# Altium PCB Shield.PcbDoc (part 3 of 3)
Units mm, origin at the board's own origin, x right, y up, seen from the top; angles counter-clockwise.
Board outline 69.82 x 93.25 mm, 4 copper layers (Top Layer, Int1 (GND), Int2 (PWR), Bottom Layer), stack 1.586 mm thick; 51 components, 80 nets, 458 pads, 669 vias.
Unrouted connection lines stored in the file: 105.
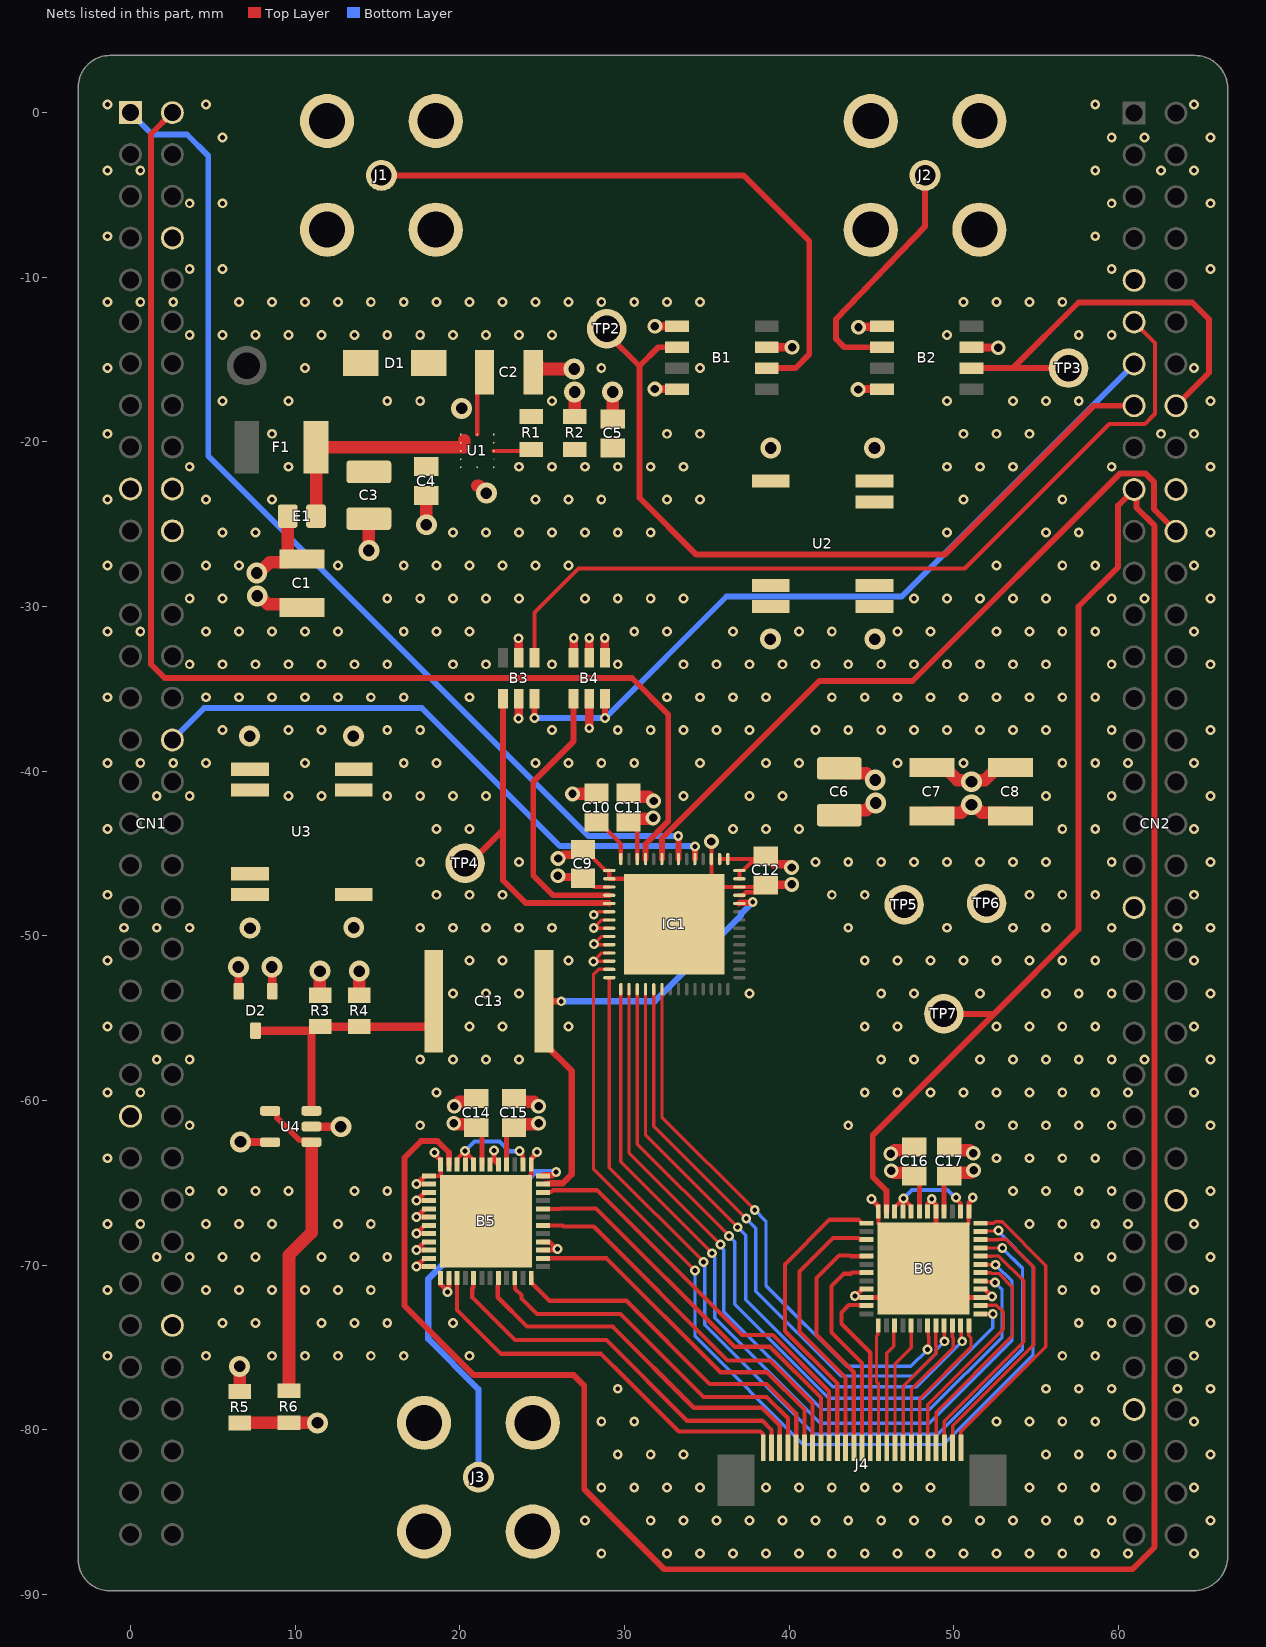
[diagram p4: the nets of this part, all layers, seen from the top]

## Via types
v1: diameter 0.6, hole 0.3, Top Layer to Bottom Layer, 618 vias
v2: diameter 1.27, hole 0.711, Top Layer to Bottom Layer, 29 vias
v3: diameter 0.9, hole 0.508, Top Layer to Bottom Layer, 22 vias

## Nets (pads, with @x,y where several pads share a name; then routed paths per layer and width w, separated by ;. In a path a pad name is that pad's centre, name@x,y a point inside that pad or via, vN(x,y) a via of type N, cw(c..) or ccw(c..) an arc to the next point about the centre after c; other vN are vias at no path point) (continued)
CH17: B6.19 IC1.48 | length 34.4
  Top Layer w0.203: IC1.48@32.282,-53.237 32.282,-61.011 v1(37.917,-66.646) ; v1(48.412,-75.133) 48.478,-75.067 48.478,-74.33 48.464,-74.316 48.464,-73.704 B6.19@48.416,-73.656
  Bottom Layer w0.203: v1(37.917,-66.646) 38.598,-67.327 38.598,-71.237 43.51,-76.149 47.396,-76.149 v1(48.412,-75.133)
CH18: B6.21 IC1.47 | length 36.5
  Top Layer w0.203: IC1.47@31.782,-53.237 31.782,-61.555 v1(37.399,-67.173) ; B6.21@49.416,-73.656 49.43,-73.67 49.43,-74.611 v1(49.444,-74.625)
  Bottom Layer w0.203: v1(37.399,-67.173) 37.973,-67.747 37.973,-71.577 43.129,-76.733 47.56,-76.733 48.941,-75.352 48.941,-75.128 v1(49.444,-74.625)
CH19: B6.23 IC1.46 | length 38.9
  Top Layer w0.203: IC1.46@31.282,-53.237 31.282,-62.1 v1(36.881,-67.699) ; B6.23@50.416,-73.656 50.464,-73.704 50.464,-74.569 v1(50.521,-74.625)
  Bottom Layer w0.203: v1(36.881,-67.699) 37.363,-68.182 37.363,-72.111 42.647,-77.394 47.752,-77.394 v1(50.521,-74.625)
CH20: B6.25 IC1.45 | length 43
  Top Layer w0.203: IC1.45@30.782,-53.237 30.782,-62.645 v1(36.363,-68.226) ; B6.25@51.616,-72.956 v1(52.375,-72.957)
  Bottom Layer w0.203: v1(36.363,-68.226) 36.703,-68.566 36.703,-72.365 42.418,-78.08 48.108,-78.08 52.375,-73.812 v1(52.375,-72.957)
CH21: B6.29 IC1.44 | length 47.6
  Top Layer w0.203: IC1.44@30.282,-53.237 30.282,-63.19 v1(35.844,-68.753) ; B6.29@51.616,-70.956 51.662,-71.002 52.455,-71.002 v1(52.502,-71.049)
  Bottom Layer w0.203: v1(35.844,-68.753) 35.844,-68.86 36.043,-69.058 36.043,-72.822 41.986,-78.765 48.539,-78.765 52.934,-74.371 52.934,-71.481 v1(52.502,-71.049)
CH22: B6.31 IC1.43 | length 51.1
  Top Layer w0.203: IC1.43@29.782,-53.237 29.782,-63.735 v1(35.326,-69.279) ; B6.31@51.616,-69.956 51.626,-69.966 52.517,-69.966 v1(52.527,-69.977)
  Bottom Layer w0.203: v1(35.326,-69.279) 35.326,-69.387 35.484,-69.544 35.484,-73.203 41.885,-79.604 48.514,-79.604 53.543,-74.574 53.543,-70.993 v1(52.527,-69.977)
CH23: B6.33 IC1.42 | length 55.6
  Top Layer w0.203: IC1.42@29.082,-52.537 29.082,-64.079 v1(34.808,-69.806) ; B6.33@51.616,-68.956 51.618,-68.958 52.948,-68.958 v1(52.951,-68.961)
  Bottom Layer w0.203: v1@34.884,-69.854 34.884,-73.619 41.529,-80.264 49.022,-80.264 54.178,-75.108 54.178,-70.188 v1(52.951,-68.961)
CH24: B6.35 IC1.41 | length 60.7
  Top Layer w0.203: IC1.41@29.082,-52.037 28.43,-52.037 28.118,-52.349 28.118,-64.16 v1(34.29,-70.333) ; B6.35@51.616,-67.956 51.641,-67.93 52.704,-67.93 v1(52.73,-67.904)
  Bottom Layer w0.203: v1(34.29,-70.333) 34.29,-74.32 40.869,-80.899 49.378,-80.899 54.813,-75.463 54.813,-70.053 52.73,-67.97 v1(52.73,-67.904)
DAC_OUT: B3.1 CN2.11 | length 51.5
  Top Layer w0.254: B3.1@24.533,-33.103 24.533,-30.356 27.203,-27.686 50.673,-27.686 59.448,-18.911 61.607,-18.911 62.23,-18.288 62.23,-13.995 CN2.11@60.96,-12.725
ELEC_TEST: B3.4 IC1.33 TP4.1 | length 20.9
  Top Layer w0.357: TP4.1@20.599,-45.593 22.633,-43.559 ; B3.4@22.633,-35.603 22.633,-43.559 ; IC1.33@29.082,-48.037 29.055,-48.01 24.007,-48.01 22.633,-46.636 22.633,-43.559
GND: B1.5 B2.3 B3.2 B4.2 B4.3 B5.1 B5.2 B5.3 B5.4 B5.5 B5.6 B5.7 B5.8 B5.9 B5.10 B5.11 B5.12 B5.13 B5.14 B5.27 B5.28 B5.37 B5.41 B5.42 B5.48 B5.49 B6.9 B6.10 B6.27 B6.28 B6.37 B6.41 B6.42 B6.48 B6.49 C1.2 C2.2 C3.2 C4.2 C6.2 C7.2 C8.2 C9.1 C10.1 C11.1 C12.1 C14.1 C15.1 C16.1 C17.1 CN1.08 CN1.19 CN1.20 CN1.22 CN1.49 CN1.60 CN2.09 CN2.20 CN2.39 CN2.54 CN2.63 D1.2 IC1.11 IC1.12 IC1.17 IC1.29 IC1.30 IC1.34 IC1.35 IC1.36 IC1.37 IC1.38 IC1.39 IC1.40 IC1.57 R2.2 R5.2 TP5.1 U1.5 U1.6 U1.7 U1.12 U2.1 U2.2 U3.1 U3.2 | length 97
  Top Layer w0.203: v1(28.118,-51.552) v1@28.133,-51.537 ; v1(28.136,-49.518) v1@28.155,-49.5 ; v1(28.136,-48.717) 28.244,-48.717 28.424,-48.537 IC1.34@29.082,-48.537 ; 28.449,-49.537 IC1.36@29.082,-49.537 ; 28.449,-49.5 v1@28.155,-49.5 ; IC1.40@29.082,-51.537 29.08,-51.539 28.135,-51.539 v1@28.133,-51.537 ; IC1.39@29.082,-51.037 29.08,-51.039 28.632,-51.039 v1@28.133,-51.537 ; IC1.38@29.082,-50.537 28.192,-50.537 v1(28.155,-50.5) 28.616,-50.039 IC1.37@29.082,-50.037 IC1.37@29.082,-50.037 ; IC1.35@29.082,-49.037 28.618,-49.037 v1@28.155,-49.5
  Top Layer w0.254: B5.11@17.865,-69.585 B5.11@18.14,-69.585 ; B5.9@17.865,-68.585 B5.9@18.14,-68.585 ; B5.7@17.865,-67.585 B5.7@18.14,-67.585 ; B5.5@17.865,-66.585 B5.5@18.14,-66.585 ; B5.3@17.865,-65.585 B5.3@18.14,-65.585 ; B5.1@18.14,-64.585 18.84,-64.585 B5.48@18.84,-63.885 ; U1.12@21.057,-19.549 C2.2@21.057,-16.203 ; B5.49@24.34,-64.585 B5.37@24.34,-63.885 ; C9.1@27.255,-44.98 C9.1@27.481,-44.754 27.636,-44.754 28.089,-45.207 28.089,-45.265 28.861,-46.037 IC1.29@29.082,-46.037 IC1.30@29.082,-46.537 IC1.57@30.282,-46.537 ; IC1.17@35.282,-45.337 v3(35.281,-44.272) ; IC1.17@35.282,-45.337 35.282,-47.037 IC1.12@36.982,-47.037 C12.1@38.326,-47.037 ; IC1.11@36.982,-47.537 37.203,-47.537 37.387,-47.353 38.13,-47.353 C12.1@38.583,-46.9 ; B6.48@45.416,-66.756 45.428,-66.768 45.428,-67.468 B6.49@48.166,-70.206 48.916,-69.456 50.893,-67.479 50.893,-66.779 B6.37@50.916,-66.756 ; B6.42@48.416,-66.756 B6.42@48.416,-66.481
  Top Layer w0.305: B5.11@17.865,-69.585 v1(17.374,-70.077) 17.38,-70.083 B5.12@17.867,-70.083 ; B5.9@17.865,-68.585 v1(17.374,-69.077) 17.38,-69.083 B5.10@17.867,-69.083 ; B5.7@17.865,-67.585 v1(17.374,-68.077) 17.38,-68.083 B5.8@17.867,-68.083 ; B5.5@17.865,-66.585 17.865,-66.594 v1(17.374,-67.085) B5.6@18.115,-67.085 ; B5.3@17.865,-65.585 17.865,-65.594 v1(17.374,-66.085) B5.4@18.115,-66.085 ; B5.1@17.865,-64.585 v1(17.374,-65.077) 17.38,-65.083 B5.2@17.867,-65.083 ; v1(18.455,-63.165) 18.47,-63.18 18.47,-63.245 B5.48@18.838,-63.613 ; B5.13@18.842,-71.058 18.842,-71.164 19.253,-71.575 v1(19.253,-71.628) 19.253,-71.548 19.338,-71.464 19.338,-70.788 B5.14@19.34,-70.785 ; v1(22.073,-63.043) 22.085,-63.055 22.085,-63.631 B5.41@22.34,-63.885 ; B5.37@24.39,-63.527 24.39,-63.497 24.689,-63.199 v1(24.689,-63.119) ; B5.27@25.04,-69.085 25.042,-69.083 25.782,-69.083 v1@25.854,-69.012 ; B5.28@25.04,-68.585 25.042,-68.588 25.43,-68.588 v1@25.854,-69.012 ; B6.10@44.443,-71.953 44.151,-71.953 44.073,-71.875 v1(43.993,-71.875) 44.026,-71.875 B6.9@44.443,-71.458 ; B6.10@44.716,-71.956 B6.49@46.416,-71.956 ; v1(45.009,-65.989) 45.009,-66.001 45.416,-66.408 B6.48@45.416,-66.481 ; B6.42@48.416,-66.481 48.416,-66.293 v1@48.666,-66.042 ; v1(48.666,-65.989) v1@48.666,-66.042 ; B6.49@48.916,-69.456 B6.41@48.916,-66.756 48.913,-66.753 48.913,-66.316 48.666,-66.069 v1@48.666,-66.042 ; B6.49@49.916,-71.956 B6.27@51.616,-71.956 ; B6.37@50.916,-66.756 50.918,-66.753 50.918,-66.205 51.156,-65.967 v1(51.156,-65.888) ; B6.27@51.888,-71.953 52.271,-71.953 v1(52.324,-71.9) 52.324,-71.889 B6.28@51.891,-71.456 ; v1@25.854,-69.012 v1(25.933,-69.012) v1@25.854,-69.012
  Top Layer w0.508: v1(23.571,-31.928) 23.583,-31.94 B3.2@23.583,-33.103 ; v3(25.972,-45.303) 26.078,-45.303 26.3,-45.08 27.155,-45.08 C9.1@27.255,-44.98 ; B4.3@26.914,-33.103 26.914,-31.913 v1(26.924,-31.902) ; B4.2@27.864,-33.103 v1(27.864,-31.902) ; v3(31.853,-12.979) B1.5@33.191,-12.979 ; C12.1@38.583,-46.9 38.595,-46.887 40.147,-46.887 v3(40.16,-46.874) ; B2.3@51.189,-14.249 51.203,-14.264 52.688,-14.264 v3(52.702,-14.278)
  Top Layer w0.762: R5.2@6.629,-77.67 v2(6.629,-76.149) ; v2(7.699,-29.361) 7.836,-29.361 8.328,-29.853 10.21,-29.853 C1.2@10.409,-30.052 ; v2(14.478,-26.594) C3.2@14.478,-24.662 ; v2@17.873,-24.935 v2(17.97,-25.032) 17.97,-23.353 C4.2@17.932,-23.315 ; v3(19.66,-60.35) 19.697,-60.35 19.967,-60.081 C14.1@20.786,-60.081 ; 21.057,-22.65 21.151,-22.65 v2(21.615,-23.114) ; C15.1@23.511,-60.081 24.483,-60.081 24.753,-60.35 v3(24.79,-60.35) ; v3(26.848,-41.377) 28.259,-41.377 C10.1@28.296,-41.34 ; R2.2@26.975,-18.456 v2(26.975,-16.967) ; C11.1@30.251,-41.34 30.45,-41.539 31.468,-41.539 31.738,-41.808 v3(31.775,-41.808) ; C6.2@43.053,-42.671 43.357,-42.367 44.694,-42.367 45.125,-41.935 v2(45.263,-41.935) ; v3(46.176,-63.235) 46.213,-63.235 46.421,-63.027 47.401,-63.027 C16.1@47.6,-62.828 ; C7.2@48.679,-42.725 48.878,-42.526 50.453,-42.526 50.942,-42.037 v2(51.079,-42.037) 51.217,-42.037 51.705,-42.526 53.243,-42.526 C8.2@53.442,-42.725 ; C17.1@49.733,-62.828 49.932,-63.027 50.963,-63.027 51.146,-63.21 v3(51.183,-63.21)
  other v1: 28.596,-87.507 32.596,-87.507 34.596,-87.507 36.596,-87.507 38.596,-87.507 40.596,-87.507 42.596,-87.507 44.596,-87.507 46.596,-87.507 48.596,-87.507 50.596,-87.507 52.596,-87.507 54.596,-87.507 56.596,-87.507 58.596,-87.507 60.596,-87.507 64.596,-87.507 27.596,-85.507 31.596,-85.507 33.596,-85.507 35.596,-85.507 37.596,-85.507 39.596,-85.507 41.596,-85.507 43.596,-85.507 45.596,-85.507 47.596,-85.507 49.596,-85.507 51.596,-85.507 53.596,-85.507 55.596,-85.507 57.596,-85.507 59.596,-85.507 65.596,-85.507 28.596,-83.507 30.596,-83.507 32.596,-83.507 34.596,-83.507 38.596,-83.507 40.596,-83.507 42.596,-83.507 44.596,-83.507 46.596,-83.507 48.596,-83.507 54.596,-83.507 56.596,-83.507 58.596,-83.507 64.596,-83.507 29.596,-81.507 31.596,-81.507 33.596,-81.507 55.596,-81.507 57.596,-81.507 59.596,-81.507 65.596,-81.507 28.596,-79.507 30.596,-79.507 52.596,-79.507 54.596,-79.507 56.596,-79.507 58.596,-79.507 64.596,-79.507 29.596,-77.507 55.596,-77.507 57.596,-77.507 59.596,-77.507 63.596,-77.507 65.596,-77.507 -1.404,-75.507 4.596,-75.507 8.596,-75.507 10.596,-75.507 12.596,-75.507 14.596,-75.507 16.596,-75.507 20.596,-75.507 56.596,-75.507 58.596,-75.507 64.596,-75.507 5.596,-73.507 7.596,-73.507 11.596,-73.507 13.596,-73.507 15.596,-73.507 19.596,-73.507 57.596,-73.507 59.596,-73.507 65.596,-73.507 -1.404,-71.507 4.596,-71.507 6.596,-71.507 8.596,-71.507 10.596,-71.507 12.596,-71.507 14.596,-71.507 56.596,-71.507 58.596,-71.507 64.596,-71.507 1.596,-69.507 3.596,-69.507 5.596,-69.507 7.596,-69.507 11.596,-69.507 13.596,-69.507 15.596,-69.507 57.596,-69.507 59.596,-69.507 65.596,-69.507 -1.404,-67.507 0.596,-67.507 4.596,-67.507 6.596,-67.507 8.596,-67.507 12.596,-67.507 14.596,-67.507 54.596,-67.507 56.596,-67.507 58.596,-67.507 60.596,-67.507 64.596,-67.507 3.596,-65.507 5.596,-65.507 7.596,-65.507 9.596,-65.507 13.596,-65.507 15.596,-65.507 53.596,-65.507 55.596,-65.507 57.596,-65.507 59.596,-65.507 65.596,-65.507 -1.404,-63.507 52.596,-63.507 54.596,-63.507 56.596,-63.507 58.596,-63.507 3.596,-61.507 17.596,-61.507 43.596,-61.507 51.596,-61.507 53.596,-61.507 55.596,-61.507 57.596,-61.507 59.596,-61.507 65.596,-61.507 -1.404,-59.507 0.596,-59.507 18.596,-59.507 44.596,-59.507 46.596,-59.507 48.596,-59.507 50.596,-59.507 52.596,-59.507 54.596,-59.507 56.596,-59.507 58.596,-59.507 60.596,-59.507 64.596,-59.507 1.596,-57.507 3.596,-57.507 17.596,-57.507 19.596,-57.507 21.596,-57.507 23.596,-57.507 45.596,-57.507 47.596,-57.507 51.596,-57.507 53.596,-57.507 55.596,-57.507 57.596,-57.507 59.596,-57.507 61.596,-57.507 65.596,-57.507 -1.404,-55.507 20.596,-55.507 22.596,-55.507 26.596,-55.507 44.596,-55.507 46.596,-55.507 52.596,-55.507 54.596,-55.507 56.596,-55.507 58.596,-55.507 64.596,-55.507 19.596,-53.507 21.596,-53.507 23.596,-53.507 37.596,-53.507 45.596,-53.507 47.596,-53.507 51.596,-53.507 55.596,-53.507 57.596,-53.507 59.596,-53.507 65.596,-53.507 -1.404,-51.507 20.596,-51.507 22.596,-51.507 26.596,-51.507 44.596,-51.507 46.596,-51.507 48.596,-51.507 50.596,-51.507 52.596,-51.507 54.596,-51.507 56.596,-51.507 58.596,-51.507 64.596,-51.507 -0.404,-49.507 1.596,-49.507 3.596,-49.507 17.596,-49.507 19.596,-49.507 21.596,-49.507 23.596,-49.507 25.596,-49.507 43.596,-49.507 49.596,-49.507 53.596,-49.507 55.596,-49.507 59.596,-49.507 63.596,-49.507 65.596,-49.507 -1.404,-47.507 18.596,-47.507 20.596,-47.507 22.596,-47.507 42.596,-47.507 44.596,-47.507 54.596,-47.507 56.596,-47.507 58.596,-47.507 64.596,-47.507 17.596,-45.507 23.596,-45.507 41.596,-45.507 43.596,-45.507 45.596,-45.507 47.596,-45.507 49.596,-45.507 51.596,-45.507 53.596,-45.507 55.596,-45.507 59.596,-45.507 65.596,-45.507 -1.404,-43.507 18.596,-43.507 20.596,-43.507 36.596,-43.507 38.596,-43.507 40.596,-43.507 56.596,-43.507 58.596,-43.507 64.596,-43.507 1.596,-41.507 3.596,-41.507 9.596,-41.507 11.596,-41.507 15.596,-41.507 17.596,-41.507 19.596,-41.507 21.596,-41.507 33.596,-41.507 37.596,-41.507 39.596,-41.507 55.596,-41.507 59.596,-41.507 65.596,-41.507 -1.404,-39.507 0.596,-39.507 2.596,-39.507 4.596,-39.507 10.596,-39.507 16.596,-39.507 18.596,-39.507 24.596,-39.507 26.596,-39.507 28.596,-39.507 30.596,-39.507 34.596,-39.507 38.596,-39.507 40.596,-39.507 46.596,-39.507 50.596,-39.507 56.596,-39.507 58.596,-39.507 60.596,-39.507 64.596,-39.507 5.596,-37.507 9.596,-37.507 11.596,-37.507 15.596,-37.507 17.596,-37.507 25.596,-37.507 29.596,-37.507 31.596,-37.507 33.596,-37.507 35.596,-37.507 37.596,-37.507 41.596,-37.507 43.596,-37.507 45.596,-37.507 47.596,-37.507 49.596,-37.507 51.596,-37.507 53.596,-37.507 55.596,-37.507 59.596,-37.507 65.596,-37.507 -1.404,-35.507 4.596,-35.507 6.596,-35.507 8.596,-35.507 10.596,-35.507 12.596,-35.507 14.596,-35.507 16.596,-35.507 20.596,-35.507 32.596,-35.507 34.596,-35.507 36.596,-35.507 38.596,-35.507 42.596,-35.507 44.596,-35.507 46.596,-35.507 48.596,-35.507 50.596,-35.507 52.596,-35.507 54.596,-35.507 56.596,-35.507 58.596,-35.507 3.596,-33.507 5.596,-33.507 7.596,-33.507 9.596,-33.507 11.596,-33.507 13.596,-33.507 15.596,-33.507 19.596,-33.507 21.596,-33.507 25.596,-33.507 29.596,-33.507 33.596,-33.507 35.596,-33.507 37.596,-33.507 39.596,-33.507 41.596,-33.507 43.596,-33.507 45.596,-33.507 47.596,-33.507 49.596,-33.507 51.596,-33.507 53.596,-33.507 55.596,-33.507 59.596,-33.507 65.596,-33.507 -1.404,-31.507 0.596,-31.507 4.596,-31.507 6.596,-31.507 8.596,-31.507 10.596,-31.507 12.596,-31.507 16.596,-31.507 18.596,-31.507 20.596,-31.507 30.596,-31.507 32.596,-31.507 36.596,-31.507 40.596,-31.507 42.596,-31.507 46.596,-31.507 48.596,-31.507 52.596,-31.507 54.596,-31.507 56.596,-31.507 58.596,-31.507 64.596,-31.507 3.596,-29.507 5.596,-29.507 15.596,-29.507 17.596,-29.507 19.596,-29.507 21.596,-29.507 23.596,-29.507 27.596,-29.507 29.596,-29.507 31.596,-29.507 33.596,-29.507 47.596,-29.507 49.596,-29.507 51.596,-29.507 53.596,-29.507 55.596,-29.507 59.596,-29.507 61.596,-29.507 65.596,-29.507 -1.404,-27.507 4.596,-27.507 6.596,-27.507 12.596,-27.507 16.596,-27.507 18.596,-27.507 20.596,-27.507 22.596,-27.507 24.596,-27.507 26.596,-27.507 52.596,-27.507 56.596,-27.507 58.596,-27.507 64.596,-27.507 5.596,-25.507 7.596,-25.507 19.596,-25.507 21.596,-25.507 23.596,-25.507 25.596,-25.507 27.596,-25.507 29.596,-25.507 31.596,-25.507 49.596,-25.507 55.596,-25.507 57.596,-25.507 65.596,-25.507 -1.404,-23.507 4.596,-23.507 8.596,-23.507 24.596,-23.507 26.596,-23.507 28.596,-23.507 32.596,-23.507 34.596,-23.507 50.596,-23.507 56.596,-23.507 3.596,-21.507 9.596,-21.507 23.596,-21.507 25.596,-21.507 27.596,-21.507 29.596,-21.507 31.596,-21.507 33.596,-21.507 49.596,-21.507 51.596,-21.507 53.596,-21.507 59.596,-21.507 65.596,-21.507 -1.404,-19.507 8.596,-19.507 32.596,-19.507 34.596,-19.507 50.596,-19.507 52.596,-19.507 54.596,-19.507 62.596,-19.507 64.596,-19.507 5.596,-17.507 9.596,-17.507 15.596,-17.507 17.596,-17.507 25.596,-17.507 49.596,-17.507 53.596,-17.507 55.596,-17.507 57.596,-17.507 65.596,-17.507 -1.404,-15.507 10.596,-15.507 28.596,-15.507 34.596,-15.507 64.596,-15.507 3.596,-13.507 5.596,-13.507 7.596,-13.507 9.596,-13.507 11.596,-13.507 13.596,-13.507 15.596,-13.507 17.596,-13.507 19.596,-13.507 21.596,-13.507 23.596,-13.507 25.596,-13.507 49.596,-13.507 57.596,-13.507 59.596,-13.507 -1.404,-11.507 0.596,-11.507 2.596,-11.507 6.596,-11.507 8.596,-11.507 10.596,-11.507 12.596,-11.507 14.596,-11.507 16.596,-11.507 18.596,-11.507 20.596,-11.507 22.596,-11.507 24.596,-11.507 26.596,-11.507 28.596,-11.507 30.596,-11.507 32.596,-11.507 34.596,-11.507 50.596,-11.507 52.596,-11.507 54.596,-11.507 56.596,-11.507 3.596,-9.507 5.596,-9.507 59.596,-9.507 65.596,-9.507 -1.404,-7.507 58.596,-7.507 3.596,-5.507 5.596,-5.507 59.596,-5.507 65.596,-5.507 -1.404,-3.507 0.596,-3.507 58.596,-3.507 62.596,-3.507 64.596,-3.507 5.596,-1.507 59.596,-1.507 61.596,-1.507 65.596,-1.507 -1.404,0.493 4.596,0.493 58.596,0.493 64.596,0.493
  other v2: 7.239,-37.871 45.212,-31.979 20.117,-17.958
IN0: B5.15 J4.01 | length 24.5
  Top Layer w0.254: B5.15@19.84,-70.785 19.84,-72.719 22.508,-75.387 28.575,-75.387 30.061,-76.873 33.299,-80.112 38.26,-80.112 38.409,-80.26 38.409,-81.072 J4.01@38.432,-81.095
IN1: B5.17 J4.02 | length 23.8
  Top Layer w0.254: B5.17@20.84,-70.785 20.817,-70.808 20.817,-71.364 20.761,-71.419 20.761,-71.964 23.347,-74.549 28.905,-74.549 33.807,-79.451 38.379,-79.451 38.932,-80.004 J4.02@38.932,-81.095
IN2: B5.20 J4.03 | length 22.9
  Top Layer w0.254: B5.20@22.34,-70.785 22.317,-70.808 22.317,-71.257 22.309,-71.265 22.309,-71.952 24.093,-73.736 29.286,-73.736 34.214,-78.664 38.354,-78.664 39.432,-79.742 J4.03@39.432,-81.095
IN3: B5.22 J4.04 | length 22.4
  Top Layer w0.254: B5.22@23.34,-70.785 23.363,-70.808 23.363,-71.439 23.74,-71.816 23.74,-72.027 24.687,-72.974 29.769,-72.974 34.798,-78.003 38.633,-78.003 39.932,-79.302 J4.04@39.932,-81.095
IN4: B5.24 J4.05 | length 21.7
  Top Layer w0.254: B5.24@24.34,-70.785 24.34,-71.06 25.441,-72.161 30.124,-72.161 35.179,-77.216 38.633,-77.216 40.432,-79.014 J4.05@40.432,-81.095
IN5: B5.26 J4.06 | length 22
  Top Layer w0.254: B5.26@25.04,-69.585 28.92,-69.585 35.839,-76.505 38.659,-76.505 40.932,-78.778 J4.06@40.932,-81.095
IN6: B5.30 J4.07 | length 23.6
  Top Layer w0.254: B5.30@25.04,-67.585 26.238,-67.585 26.314,-67.661 28.138,-67.661 36.271,-75.794 38.837,-75.794 41.432,-78.389 J4.07@41.432,-81.095
IN7: B5.32 J4.08 | length 24.7
  Top Layer w0.254: B5.32@25.04,-66.585 26.094,-66.585 26.127,-66.553 28.275,-66.553 36.678,-74.955 38.837,-74.955 41.932,-78.051 J4.08@41.932,-81.095
IN8: B5.34 J4.09 | length 25.9
  Top Layer w0.254: B5.34@25.04,-65.585 25.063,-65.562 25.55,-65.562 25.666,-65.447 28.337,-65.447 37.135,-74.244 39.014,-74.244 42.432,-77.662 J4.09@42.432,-81.095
IN9: B6.1 J4.10 | length 18.8
  Top Layer w0.254: J4.10@42.932,-81.095 42.932,-77.196 39.751,-74.016 39.751,-69.952 42.463,-67.24 44.225,-67.24 44.418,-67.433 B6.1@44.896,-67.433
IN10: B6.3 J4.11 | length 17
  Top Layer w0.254: J4.11@43.432,-81.095 43.432,-76.833 40.64,-74.041 40.64,-70.383 42.676,-68.348 44.212,-68.348 44.297,-68.433 B6.3@44.896,-68.433
IN11: B6.5 J4.12 | length 15.1
  Top Layer w0.254: J4.12@43.932,-81.095 43.932,-76.492 41.669,-74.23 41.669,-70.776 43.036,-69.41 43.708,-69.41 43.753,-69.456 B6.5@44.919,-69.456
IN12: B6.7 J4.13 | length 13.3
  Top Layer w0.254: J4.13@44.432,-81.095 44.432,-75.947 42.57,-74.085 42.57,-71.272 43.325,-70.518 43.763,-70.518 43.826,-70.456 44.873,-70.456 B6.7@44.896,-70.479
IN13: B6.11 J4.14 | length 10.9
  Top Layer w0.254: B6.11@44.919,-72.456 44.896,-72.433 44.215,-72.433 44.211,-72.429 43.624,-72.429 43.18,-72.873 43.18,-73.558 44.932,-75.31 J4.14@44.932,-81.095
IN14: B6.13 J4.15 | length 7.5
  Top Layer w0.203: B6.13@45.416,-73.656 45.386,-73.685 45.386,-74.225 45.307,-74.305 45.307,-77.07 45.432,-77.195 J4.15@45.432,-81.095
IN15: B6.15 J4.16 | length 7.6
  Top Layer w0.203: J4.16@45.932,-81.095 45.932,-75.353 46.364,-74.921 46.364,-74.305 46.367,-74.301 46.367,-73.704 B6.15@46.416,-73.656
IN16: B6.17 J4.17 | length 7.9
  Top Layer w0.203: J4.17@46.432,-81.095 46.432,-76.022 47.421,-75.032 47.421,-73.661 B6.17@47.416,-73.656
IN17: B6.20 J4.18 | length 8.3
  Top Layer w0.203: J4.18@46.932,-81.095 46.932,-77.361 48.941,-75.352 48.941,-74.914 48.916,-74.889 B6.20@48.916,-73.656
IN18: B6.22 J4.19 | length 8.5
  Top Layer w0.203: J4.19@47.432,-81.095 47.432,-77.547 49.973,-75.006 49.973,-74.406 49.917,-74.351 49.917,-73.657 B6.22@49.916,-73.656
IN19: B6.24 J4.20 | length 8.8
  Top Layer w0.203: J4.20@47.932,-81.095 47.932,-78.12 51.049,-75.003 51.049,-74.406 50.916,-74.273 B6.24@50.916,-73.656
IN20: B6.26 J4.21 | length 11.7
  Top Layer w0.203: J4.21@48.432,-81.095 48.432,-78.467 53.01,-73.889 53.01,-72.845 52.594,-72.429 51.643,-72.429 B6.26@51.616,-72.456
IN21: B6.30 J4.22 | length 14
  Top Layer w0.203: J4.22@48.932,-81.095 48.932,-78.932 53.569,-74.295 53.569,-71.349 52.726,-70.506 52.308,-70.506 52.258,-70.456 B6.30@51.616,-70.456
IN22: B6.32 J4.23 | length 15.4
  Top Layer w0.203: J4.23@49.432,-81.095 49.432,-79.473 54.254,-74.651 54.254,-70.957 52.746,-69.448 52.308,-69.448 52.301,-69.456 B6.32@51.616,-69.456
IN23: B6.34 J4.24 | length 17
  Top Layer w0.203: J4.24@49.932,-81.095 49.932,-79.761 54.864,-74.828 54.864,-70.127 53.17,-68.432 52.732,-68.432 52.709,-68.456 B6.34@51.616,-68.456
IN24: B6.36 J4.25 | length 18.3
  Top Layer w0.203: J4.25@50.432,-81.095 50.434,-81.093 50.434,-80.122 55.601,-74.955 55.601,-70.027 52.949,-67.375 52.511,-67.375 52.434,-67.452 51.619,-67.452 B6.36@51.616,-67.456
ISO_5V: B2.8 U2.5 | length 1.4
  Top Layer w0.508: v3@44.221,-16.789 B2.8@45.587,-16.789
  other v2: 38.887,-20.371
  other v3: 44.196,-16.815
ISO_GND: B1.3 B2.5 J1.2 J1.3 J1.4 J1.5 J2.2 J2.3 J2.4 J2.5 U2.3 U2.4 | length 3
  Top Layer w0.508: B1.3@38.641,-14.249 v3(40.183,-14.249) ; v3(44.221,-13.03) 44.247,-13.005 45.612,-13.005 B2.5@45.637,-12.979
  other v2: 45.187,-20.371
MISO: CN1.02 IC1.25 | length 76.1
  Top Layer w0.357: CN1.02@2.54,0 1.245,-1.295 1.245,-33.503 2.083,-34.341 30.455,-34.341 32.664,-36.551 32.664,-43.046 31.282,-44.429 IC1.25@31.282,-45.337
MOSI: CN2.22 IC1.23 | length 44.1
  Top Layer w0.357: IC1.23@32.282,-45.337 32.282,-44.078 41.841,-34.519 47.498,-34.519 60.107,-21.91 61.635,-21.91 62.154,-22.428 62.154,-24.079 CN2.22@63.5,-25.425
NetB1_2: B1.2 J1.1 | length 37.4
  Top Layer w0.357: J1.1@15.24,-3.81 37.236,-3.81 41.224,-7.798 41.224,-14.681 40.386,-15.519 B1.2@38.641,-15.519
NetB2_6: B2.6 J2.1 | length 15.1
  Top Layer w0.357: B2.6@45.637,-14.249 43.358,-14.249 42.85,-13.741 42.85,-12.546 48.26,-6.907 J2.1@48.26,-3.81
NetC3_1: C3.1 D1.1 E1.1 F1.2 U1.1 U1.2 U1.3 | length 13.6
  Top Layer w0.762: E1.1@11.269,-24.511 F1.2@11.269,-20.32 14.478,-20.32 20.27,-20.32 20.282,-20.309 20.282,-19.887
NetC4_1: C4.1 U1.4
NetC5_1: C5.1 R1.2 R2.1 U1.9 | length 1.7
  Top Layer w0.254: U1.9@22.057,-20.549 R1.2@23.8,-20.549
NetC10_2: C10.2 IC1.28 | length 3
  Top Layer w0.254: C10.2@28.296,-43.09 28.451,-43.09 29.782,-44.421 IC1.28@29.782,-45.337
NetC13_1: C13.1 D2.3 R3.2 R4.1 U4.3 | length 16.2
  Top Layer w0.254: R3.2@10.991,-55.847 11.324,-55.514 R3.2@11.532,-55.514
  Top Layer w0.508: D2.3@7.595,-55.759 11.057,-55.759 11.302,-55.514 R3.2@11.324,-55.514 ; U4.3@10.991,-60.632 R3.2@10.991,-55.847 ; R3.2@11.532,-55.514 R4.1@13.894,-55.514 C13.1@18.466,-55.514
NetJ3_2: J3.2 J3.3 J3.4 J3.5 R5.1 R6.1 | length 4.7
  Top Layer w0.762: R5.1@6.629,-79.58 v2(11.354,-79.58)
NetR6_2: R6.2 U4.1 U4.4 | length 19.1
  Top Layer w0.357: U4.4@8.481,-60.632 8.791,-60.632 8.907,-60.748 8.907,-61.058 10.264,-62.416 10.874,-62.416 U4.1@10.991,-62.532
  Top Layer w0.762: R6.2@9.627,-77.64 9.627,-69.393 10.999,-68.02 U4.1@10.999,-62.618
NSS: CN1.32 IC1.19 | length 36.8
  Top Layer w0.357: IC1.19@34.282,-45.337 34.286,-45.333 34.286,-44.581 v1(34.29,-44.577)
  Bottom Layer w0.357: CN1.32@2.54,-38.1 4.47,-36.17 17.71,-36.17 26.093,-44.552 34.265,-44.552 v1(34.29,-44.577)
OPA_5V: D2.1 R3.1 U3.5 U4.5 | length 4.8
  Top Layer w0.254: v2(8.585,-51.892) v2@8.6,-51.907 ; D2.1@8.6,-53.345 D2.1@8.615,-53.359
  Top Layer w0.357: U4.5@8.466,-62.546 U4.5@8.481,-62.532 ; R3.1@11.506,-53.579 R3.1@11.532,-53.604
  Top Layer w0.508: v2(6.68,-62.509) 6.691,-62.521 8.441,-62.521 U4.5@8.466,-62.546 ; D2.1@8.6,-53.345 v2@8.6,-51.907
  Top Layer w0.762: R3.1@11.506,-53.579 v2(11.506,-52.146)
  other v2: 13.559,-49.505
OPA_GND: D2.2 R4.2 U3.3 U3.4 U4.2 | length 4.7
  Top Layer w0.254: v2(6.553,-51.892) v2@6.564,-51.903 ; D2.2@6.564,-53.348 D2.2@6.575,-53.359 ; U4.2@10.991,-61.582 U4.2@10.997,-61.588
  Top Layer w0.508: D2.2@6.564,-53.348 v2@6.564,-51.903 ; U4.2@10.997,-61.588 12.77,-61.588 v2(12.776,-61.595)
  Top Layer w0.762: R4.2@13.894,-53.604 v2(13.894,-52.146)
  other v2: 7.264,-49.53
REF_IN: B5.36 J3.1 | length 24.7
  Top Layer w0.381: B5.36@25.04,-64.585 25.08,-64.545 25.618,-64.545 25.825,-64.338 v1(25.857,-64.338)
  Bottom Layer w0.381: J3.1@21.131,-82.88 21.131,-77.527 18.085,-74.481 18.085,-70.841 24.587,-64.338 v1(25.857,-64.338)
SCK: CN1.01 IC1.21 | length 63.6
  Top Layer w0.357: v1(33.269,-43.947) 33.275,-43.953 33.275,-45.331 IC1.21@33.282,-45.337
  Bottom Layer w0.357: CN1.01@0,0 1.326,-1.326 3.434,-1.326 4.724,-2.616 4.724,-20.854 27.817,-43.947 v1(33.269,-43.947)
STIM_CTRL: B3.6 B4.6 CN2.13 | length 47.7
  Top Layer w0.357: B3.6@24.533,-35.603 24.535,-35.605 24.535,-36.778 v1(24.536,-36.779) ; B4.6@28.814,-35.603 28.821,-35.611 v1(28.821,-36.772)
  Bottom Layer w0.357: v1(24.536,-36.779) 24.54,-36.775 28.818,-36.775 36.205,-29.388 46.837,-29.388 CN2.13@60.96,-15.265
SW_5V: B5.43 B6.43 C1.1 C14.2 C16.2 E1.2 U2.6 U2.7 U3.6 U3.7 | length 13
  Top Layer w0.254: C14.2@21.006,-61.632 C14.2@21.34,-61.966 ; C16.2@47.6,-64.578 C16.2@47.916,-64.894
  Top Layer w0.305: B5.43@21.34,-63.885 C14.2@21.34,-61.966 ; B6.43@47.916,-66.756 C16.2@47.916,-64.894
  Top Layer w0.762: v2(7.667,-27.965) 7.804,-27.965 8.468,-27.301 9.549,-27.301 C1.1@9.748,-27.102 ; E1.2@9.549,-24.511 9.549,-26.903 C1.1@9.748,-27.102 ; C1.1@10.409,-27.102 C1.1@9.748,-27.102 ; v3(19.63,-61.377) 19.668,-61.377 19.723,-61.433 20.731,-61.433 C14.2@20.761,-61.463 ; v3(46.203,-64.262) 46.24,-64.262 46.357,-64.379 47.401,-64.379 C16.2@47.512,-64.491
  other v2: 13.538,-37.871 38.862,-31.979
SW_CLR: B5.47 B6.47 CN2.19 TP7.1 | length 188.2
  Top Layer w0.357: B5.47@19.34,-63.885 19.34,-63.159 18.639,-62.459 17.653,-62.459 16.637,-63.475 16.637,-72.466 20.853,-76.683 26.924,-76.683 27.559,-77.318 27.559,-83.617 32.41,-88.468 60.858,-88.468 62.205,-87.122 62.205,-25.095 61.092,-23.983 61.092,-23.017 CN2.19@60.96,-22.885 59.985,-23.86 59.985,-27.595 57.582,-29.998 57.582,-49.606 52.464,-54.724 ; B6.47@45.916,-66.756 45.916,-65.474 45.085,-64.643 45.085,-62.103 52.464,-54.724 ; TP7.1@49.403,-54.737 52.451,-54.737 52.464,-54.724
SYNC_IN: B1.6 CN2.15 TP2.1 | length 49.1
  Top Layer w0.357: TP2.1@28.931,-13.132 28.931,-13.411 30.912,-15.392 ; B1.6@33.191,-14.249 32.055,-14.249 30.912,-15.392 ; CN2.15@60.96,-17.805 58.497,-17.805 49.454,-26.848 34.366,-26.848 30.912,-23.393 30.912,-15.392
SYNC_OUT: B2.2 CN2.16 TP3.1 | length 26
  Top Layer w0.357: B2.2@51.087,-15.519 53.594,-15.519 ; TP3.1@56.972,-15.519 53.594,-15.519 ; CN2.16@63.5,-17.805 65.507,-15.798 65.507,-12.548 64.491,-11.532 57.582,-11.532 53.594,-15.519
VDD: B1.8 B3.5 B4.1 B4.5 B5.38 B5.40 B5.44 B5.45 B5.46 B6.38 B6.40 B6.44 B6.45 B6.46 C2.1 C5.2 C6.1 C7.1 C8.1 C9.2 C11.2 C12.2 C15.2 C17.2 IC1.13 IC1.14 IC1.15 IC1.16 IC1.26 IC1.31 R1.1 TP6.1 U1.10 U1.11 | length 52
  Top Layer w0.254: B5.46@19.84,-63.885 19.863,-63.862 19.863,-63.525 v1(20.32,-63.068) v1@20.34,-63.088 ; B5.45@20.34,-63.885 v1@20.34,-63.088 ; B5.44@20.84,-63.885 20.84,-63.61 20.34,-63.11 v1@20.34,-63.088 ; C15.2@22.84,-62.084 C15.2@23.292,-61.632 ; v1(23.635,-63.059) 23.635,-63.107 23.817,-63.289 23.817,-63.862 B5.38@23.84,-63.885 ; C9.2@27.481,-46.504 27.636,-46.504 28.168,-47.037 IC1.31@29.082,-47.037 ; C11.2@30.329,-43.09 30.782,-43.543 IC1.26@30.782,-45.337 ; IC1.16@35.782,-45.337 IC1.15@36.282,-45.337 C12.2@37.923,-45.337 ; IC1.13@36.982,-46.537 IC1.14@36.982,-46.037 ; IC1.14@37.23,-46.01 37.923,-45.316 C12.2@38.583,-45.316 ; B6.46@46.416,-66.756 46.416,-66.481 46.439,-66.458 46.932,-65.964 v1(46.939,-65.964) ; B6.45@46.916,-66.756 46.927,-66.744 46.927,-65.976 v1(46.939,-65.964) ; B6.44@47.416,-66.756 47.393,-66.733 47.393,-66.417 v1(46.939,-65.964) ; v1(50.14,-65.888) 50.14,-65.981 50.393,-66.234 50.393,-66.733 B6.38@50.416,-66.756
  Top Layer w0.305: B5.40@22.84,-63.885 C15.2@22.84,-62.084 ; B6.40@49.416,-66.756 C17.2@49.416,-64.896
  Top Layer w0.508: v1(23.571,-36.805) 23.583,-36.793 B3.5@23.583,-35.603 ; v3(25.959,-46.355) 26.033,-46.43 27,-46.43 27.15,-46.279 C9.2@27.15,-46.276 ; v1(27.864,-37.389) B4.5@27.864,-35.603 ; v1(28.804,-31.902) 28.814,-31.913 B4.1@28.814,-33.103 ; v3(31.853,-16.789) B1.8@33.141,-16.789 ; C12.2@38.905,-45.497 39.05,-45.642 39.883,-45.642 40.088,-45.847 v3(40.157,-45.847)
  Top Layer w0.762: C15.2@23.511,-61.438 23.516,-61.433 24.698,-61.433 24.753,-61.377 v3(24.79,-61.377) ; C2.1@24.843,-15.392 25.021,-15.57 v2(26.949,-15.57) ; C5.2@29.286,-18.613 v2(29.286,-16.967) ; C11.2@30.251,-43.09 30.45,-42.891 31.652,-42.891 31.708,-42.835 v3(31.745,-42.835) ; C6.1@43.053,-39.829 43.357,-40.133 44.694,-40.133 45.1,-40.538 v2(45.237,-40.538) ; C7.1@48.679,-39.775 49.459,-39.775 50.227,-40.543 50.982,-40.543 v2(51.079,-40.64) 51.177,-40.543 51.893,-40.543 52.662,-39.775 C8.1@53.442,-39.775 ; C17.2@49.932,-64.379 51.026,-64.379 51.169,-64.237 v3(51.206,-64.237)
  Bottom Layer w0.254: v1(20.32,-63.068) 20.899,-62.489 22.403,-62.489 22.995,-63.08 23.613,-63.08 v1(23.635,-63.059) ; v1(46.939,-65.964) 47.468,-65.435 49.629,-65.435 50.081,-65.888 v1(50.14,-65.888)
VESD: B4.4 IC1.32 | length 16.9
  Top Layer w0.357: B4.4@26.914,-35.603 26.914,-38.186 24.46,-40.64 24.46,-46.33 25.668,-47.537 IC1.32@29.082,-47.537
VREF: B5.35 C13.2 IC1.10 | length 29
  Top Layer w0.381: B5.35@25.274,-65.045 25.475,-65.045 25.492,-65.027 26.26,-65.027 26.797,-64.491 26.797,-58.204 25.118,-56.525 C13.2@25.118,-53.975 v1(26.162,-53.975) ; IC1.10@36.982,-48.037 37.025,-47.993 37.753,-47.993 v1(37.795,-47.951)
  Bottom Layer w0.381: v1(26.162,-53.975) 31.852,-53.975 37.084,-48.742 37.084,-48.662 v1(37.795,-47.951)
pads on no net: B1.1 B1.4 B1.7 B2.1 B2.4 B2.7 B3.3 B5.39 B6.39 CN1.03 CN1.04 CN1.05 CN1.06 CN1.07 CN1.09 CN1.10 CN1.11 CN1.12 CN1.13 CN1.14 CN1.15 CN1.16 CN1.17 CN1.21 CN1.23 CN1.24 CN1.25 CN1.26 CN1.27 CN1.28 CN1.29 CN1.30 CN1.31 CN1.33 CN1.34 CN1.35 CN1.36 CN1.37 CN1.38 CN1.39 CN1.40 CN1.41 CN1.42 CN1.43 CN1.44 CN1.45 CN1.46 CN1.47 CN1.48 CN1.50 CN1.51 CN1.52 CN1.53 CN1.54 CN1.55 CN1.56 CN1.57 CN1.58 CN1.59 CN1.61 CN1.62 CN1.63 CN1.64 CN1.65 CN1.66 CN1.67 CN1.68 CN1.69 CN1.70 CN2.01 CN2.02 CN2.03 CN2.04 CN2.05 CN2.06 CN2.07 CN2.08 CN2.10 CN2.12 CN2.14 CN2.17 CN2.18 CN2.21 CN2.23 CN2.24 CN2.25 CN2.26 CN2.27 CN2.28 CN2.29 CN2.30 CN2.31 CN2.32 CN2.33 CN2.34 CN2.35 CN2.36 CN2.37 CN2.38 CN2.40 CN2.41 CN2.42 CN2.43 CN2.44 CN2.45 CN2.46 CN2.47 CN2.48 CN2.49 CN2.50 CN2.51 CN2.52 CN2.53 CN2.55 CN2.56 CN2.57 CN2.58 CN2.59 CN2.60 CN2.61 CN2.62 CN2.64 CN2.65 CN2.66 CN2.67 CN2.68 CN2.69 CN2.70 IC1.18 IC1.20 IC1.22 IC1.24 IC1.27 J4.S1 J4.S2 U1.8

## Polygon pours and split planes (outlines as drawn)
GND on Bottom Layer "GND_L04_P001" (solid, remove dead copper, pour order 1): -3.175,-87.875 ccw(c-1.275,-87.875) -1.275,-89.775 64.55,-89.775 ccw(c64.55,-87.675) 66.65,-87.675 66.726,-87.675 66.726,1.45 66.65,1.45 ccw(c64.625,1.45) 64.625,3.475 -1.25,3.475 ccw(c-1.238,1.537) -3.175,1.525
GND on Top Layer "GND_L01_P000" (solid, remove dead copper, pour order 0): -3.175,-87.875 ccw(c-1.275,-87.875) -1.275,-89.775 64.55,-89.775 ccw(c64.55,-87.675) 66.65,-87.675 66.726,-87.675 66.726,1.45 66.65,1.45 ccw(c64.625,1.45) 64.625,3.475 -1.25,3.475 ccw(c-1.238,1.537) -3.175,1.525
SW_5V on Int2 (PWR) (split plane): 64.795,2.957 64.963,2.929 65.126,2.882 65.283,2.817 65.432,2.734 65.571,2.636 65.698,2.523 65.811,2.396 65.909,2.257 65.992,2.108 66.057,1.951 66.104,1.788 66.132,1.62 66.141,1.465 66.14,1.45 66.14,-87.675 66.141,-87.691 66.132,-87.853 66.102,-88.029 66.053,-88.201 65.984,-88.366 65.898,-88.522 65.795,-88.668 65.676,-88.801 65.543,-88.92 65.397,-89.023 65.241,-89.109 65.076,-89.178 64.904,-89.227 64.728,-89.257 64.566,-89.266 64.55,-89.265 26.749,-89.265 26.749,-77.445 26.739,-77.395 26.711,-77.353 26.669,-77.325 26.619,-77.315 -2.665,-77.315 -2.665,-24.259 21.588,-24.259 21.588,-62.357 21.588,-70.841 21.597,-70.89 21.625,-70.932 21.667,-70.96 21.717,-70.97 32.791,-70.97 32.841,-70.96 32.883,-70.932 32.911,-70.89 32.921,-70.841 32.921,-64.77 32.921,-59.87 48.537,-59.87 48.537,-76.454 48.547,-76.504 48.575,-76.546 48.617,-76.574 48.666,-76.583 55.956,-76.583 56.006,-76.574 56.048,-76.546 56.076,-76.504 56.086,-76.454 56.086,-34.519 56.076,-34.469 56.048,-34.427 56.033,-34.417 56.022,-34.402 55.98,-34.374 55.931,-34.364 36.096,-34.364 36.096,-26.291 48.336,-26.291 48.386,-26.282 48.428,-26.254 48.456,-26.212 48.457,-26.206 48.462,-26.205 48.504,-26.177 48.532,-26.135 48.542,-26.086 48.542,-10.95 57.15,-10.95 57.2,-10.94 57.242,-10.912 57.27,-10.87 57.279,-10.82 57.279,2.965 64.625,2.965 64.64,2.966
VDD on Int2 (PWR) (split plane): -1.25,2.965 6.221,2.965 6.221,-10.795 6.23,-10.845 6.258,-10.887 6.3,-10.915 6.35,-10.924 35.837,-10.924 35.837,-26.162 35.837,-34.493 35.847,-34.543 35.875,-34.585 35.917,-34.613 35.966,-34.623 55.827,-34.623 55.827,-76.325 48.796,-76.325 48.796,-59.741 48.786,-59.691 48.758,-59.649 48.716,-59.621 48.666,-59.611 32.791,-59.611 32.742,-59.621 32.7,-59.649 32.672,-59.691 32.662,-59.741 32.662,-64.77 32.662,-70.711 21.846,-70.711 21.846,-62.357 21.846,-24.13 21.837,-24.08 21.809,-24.038 21.767,-24.01 21.717,-24.001 -2.665,-24.001 -2.665,1.525 -2.666,1.544 -2.658,1.698 -2.631,1.856 -2.587,2.01 -2.525,2.158 -2.448,2.298 -2.355,2.429 -2.248,2.548 -2.129,2.655 -1.998,2.748 -1.858,2.825 -1.71,2.887 -1.556,2.931 -1.398,2.958 -1.26,2.965
OPA_5V on Int2 (PWR) (split plane): 16.101,-64.26 4.981,-64.26 4.981,-43.309 16.101,-43.309
ISO_5V on Int2 (PWR) (split plane): 57.021,-10.691 48.412,-10.691 48.363,-10.701 48.321,-10.729 48.293,-10.771 48.283,-10.82 48.283,-26.033 36.096,-26.033 36.096,-10.795 36.086,-10.745 36.058,-10.703 36.016,-10.675 35.966,-10.666 6.479,-10.666 6.479,2.965 57.021,2.965
ISO_GND on Int1 (GND) (split plane): 57.021,-10.716 48.412,-10.716 48.363,-10.726 48.321,-10.754 48.293,-10.796 48.283,-10.844 48.236,-10.853 48.194,-10.881 48.166,-10.923 48.156,-10.973 48.156,-25.931 36.096,-25.931 36.096,-10.82 36.086,-10.771 36.058,-10.729 36.016,-10.701 35.966,-10.691 6.505,-10.691 6.505,2.965 57.021,2.965
OPA_GND on Int1 (GND) (split plane): 16.101,-64.26 4.981,-64.26 4.981,-43.309 16.101,-43.309
NetJ3_2 on Int1 (GND) (split plane): 26.49,-89.265 -1.275,-89.265 -1.289,-89.266 -1.431,-89.258 -1.585,-89.232 -1.735,-89.189 -1.879,-89.129 -2.015,-89.053 -2.143,-88.963 -2.259,-88.859 -2.363,-88.743 -2.453,-88.615 -2.529,-88.479 -2.589,-88.335 -2.632,-88.185 -2.658,-88.031 -2.666,-87.889 -2.665,-87.875 -2.665,-77.574 26.49,-77.574
GND on Int1 (GND) (split plane): 64.795,2.957 64.963,2.929 65.126,2.882 65.283,2.817 65.432,2.734 65.571,2.636 65.698,2.523 65.811,2.396 65.909,2.257 65.992,2.108 66.057,1.951 66.104,1.788 66.132,1.62 66.141,1.465 66.14,1.45 66.14,-87.675 66.141,-87.691 66.132,-87.853 66.102,-88.029 66.053,-88.201 65.984,-88.366 65.898,-88.522 65.795,-88.668 65.676,-88.801 65.543,-88.92 65.397,-89.023 65.241,-89.109 65.076,-89.178 64.904,-89.227 64.728,-89.257 64.566,-89.266 64.55,-89.265 26.749,-89.265 26.749,-77.445 26.747,-77.434 26.747,-77.419 26.741,-77.406 26.739,-77.395 26.737,-77.392 26.733,-77.386 26.727,-77.372 26.717,-77.362 26.711,-77.353 26.702,-77.347 26.691,-77.337 26.678,-77.331 26.669,-77.325 26.658,-77.323 26.645,-77.317 26.63,-77.317 26.619,-77.315 -2.665,-77.315 -2.665,1.525 -2.666,1.544 -2.658,1.698 -2.631,1.856 -2.587,2.01 -2.525,2.158 -2.448,2.298 -2.355,2.429 -2.248,2.548 -2.129,2.655 -1.998,2.748 -1.858,2.825 -1.71,2.887 -1.556,2.931 -1.398,2.958 -1.26,2.965 -1.25,2.965 6.246,2.965 6.246,-10.82 6.256,-10.87 6.284,-10.912 6.326,-10.94 6.375,-10.95 35.837,-10.95 35.837,-26.06 35.847,-26.11 35.875,-26.152 35.917,-26.18 35.966,-26.19 48.285,-26.19 48.335,-26.18 48.377,-26.152 48.405,-26.11 48.415,-26.06 48.415,-10.975 57.099,-10.975 57.149,-10.965 57.191,-10.937 57.211,-10.907 57.242,-10.887 57.27,-10.845 57.279,-10.795 57.279,2.965 64.625,2.965 64.64,2.966

## Other copper
Top Layer:
  rectangle net GND: 44.044,-32.868 46.33,-28.296
  rectangle net GND: 20.932,-21.474 21.652,-21.199
  rectangle net GND: 19.177,-18.872 20.98,-14.427
  rectangle net GND: 19.757,-23.876 22.357,-21.424
  rectangle net GND: 21.692,-64.567 22.504,-63.449
  rectangle net GND: 6.096,-41.554 8.407,-36.982
  rectangle net GND: 18.542,-70.129 18.999,-64.541
  rectangle net VDD: 23.876,-18.923 25.044,-14.402
  rectangle net VDD: 21.311,-18.923 25.044,-17.983
  rectangle net VDD: 20.98,-20.049 21.307,-19.939
  rectangle net VDD: 21.307,-20.174 22.357,-17.983
  rectangle net VDD: 21.307,-19.974 21.615,-19.939
  rectangle net VDD: 20.93,-21.006 21.539,-19.939
  rectangle net SW_5V: 12.395,-41.554 14.707,-36.982
  rectangle net SW_5V: 37.719,-32.868 40.03,-28.296
  rectangle net ISO_GND: 44.044,-24.054 46.33,-19.304
  rectangle net ISO_5V: 37.744,-22.784 40.03,-19.304
  region net OPA_5V: 14.707,-47.092 12.421,-47.092 12.421,-50.571 14.707,-50.571
  region net OPA_GND: 8.407,-45.847 6.096,-45.847 6.096,-50.419 8.407,-50.419
  rectangle net NetC3_1: 13.106,-22.504 15.85,-20.574
  rectangle net NetC3_1: 11.989,-19.964 15.062,-14.427
  rectangle net NetC5_1: 22.581,-20.955 30.023,-19.787
  rectangle net NetC4_1: 17.221,-21.174 20.057,-20.924
  rectangle net NetC3_1: 15.037,-20.674 20.807,-19.101
  pour cut-out: -3.175,-87.884 -3.175,-77.445 26.619,-77.445 26.619,-89.764 -1.27,-89.764 -1.275,-89.775 cw(c-1.275,-87.875)
  pour cut-out: 4.851,-64.389 4.851,-43.18 16.231,-43.18 16.231,-64.389
  pour cut-out: 6.375,-10.82 6.375,3.404 6.35,3.429 57.15,3.429 57.15,-10.795 57.099,-10.846 48.412,-10.846 48.285,-10.973 48.285,-26.06 35.966,-26.06 35.966,-10.82
Bottom Layer:
  pour cut-out: -3.223,-87.997 -3.223,-77.558 26.571,-77.558 26.571,-89.877 -1.318,-89.877 -1.323,-89.888 cw(c-1.323,-87.988)
  pour cut-out: 4.826,-64.389 4.826,-43.18 16.205,-43.18 16.205,-64.389
  pour cut-out: 6.375,-10.82 6.375,3.404 6.35,3.429 57.15,3.429 57.15,-10.795 57.099,-10.846 48.412,-10.846 48.285,-10.973 48.285,-26.06 35.966,-26.06 35.966,-10.82
Int1 (GND) (plane layer: these items are gaps in the copper):
  pour cut-out: -3.2,-77.572 cw(c-3.2,-77.445) -3.2,-77.317 26.619,-77.317 cw(c26.619,-77.445) 26.747,-77.445 26.747,-89.687 cw(c26.619,-89.687) 26.492,-89.687 26.492,-77.572
  lines w0.254: -3.2,-77.445 26.619,-77.445 26.619,-89.687 ; 6.35,3.429 57.15,3.429 57.15,-10.795 ; 6.375,3.404 6.375,-10.82 35.966,-10.82 35.966,-26.06 48.285,-26.06 48.285,-10.973 ; 48.412,-10.846 57.099,-10.846 ; 4.851,-64.389 16.231,-64.389 16.231,-43.18 4.851,-43.18 4.851,-64.389
Int2 (PWR) (plane layer: these items are gaps in the copper):
  region: -3.175,-87.884 -3.175,-77.445 26.619,-77.445 26.619,-89.764 -1.27,-89.764 -1.275,-89.775 cw(c-1.275,-87.875)
  lines w0.254: -3.2,-24.13 21.717,-24.13 21.717,-62.357 21.717,-70.841 32.791,-70.841 32.791,-64.77 32.791,-59.741 44.933,-59.741 48.666,-59.741 48.666,-76.454 55.956,-76.454 55.956,-34.519 ; -3.175,-87.884 -3.175,-77.445 26.619,-77.445 26.619,-89.764 -1.27,-89.764 ; 6.35,3.404 6.35,-10.795 35.966,-10.795 35.966,-26.162 ; 48.336,-26.162 35.966,-26.162 ; 48.412,-26.086 48.412,-10.82 57.15,-10.82 57.15,3.251 ; 55.931,-34.493 35.966,-34.493 35.966,-26.162 ; 4.851,-64.389 16.231,-64.389 16.231,-43.18 4.851,-43.18 4.851,-64.389

## Silkscreen, mask and mechanical layers (free items; w line width, h text height)
Top Overlay:
  text "25 Channel Analogue Front End" at 22.152,-5.334 h1.52
Bottom Overlay:
  drawing of 15 lines, arcs and shapes, not listed
  text "James F / 2026" at 36.981,-7.925 h1.52
  text "Sync In" at 20.191,-11.913 h1.52
  text "Sync Out" at 53.846,-11.913 h1.52
  text "TP1: 5V / TP2: SYNC_IN / TP3: SYNC_OUT / TP4: ELEC_TEST / TP5: GND / TP6: VDD (3V3) / TP7: SW_CLR" at 40.691,-39.04 h1.14
  text "NSS: PA4 / SCK: PC10 / MISO: PC11 / MOSI: PB2 / DAC_OUT: PA5 / STIM_CTRL: PA6 / SYNC_IN: PA7 / SYNC_OUT: PB12 / SW_CLR: PC7" at 21.971,-41.148 h1.14
  text "Intan RHD2132" at 36.779,-51.359 h1.14
  text "Reference In" at 30.656,-75.997 h1.52
  text "Recording Electrodes In" at 53.957,-82.829 h1.52
Mechanical 1:
  lines w0.254: 66.65,-87.675 cw(c64.55,-87.675) 64.55,-89.775 -1.275,-89.775 cw(c-1.275,-87.875) -3.175,-87.875 -3.175,1.525 cw(c-1.238,1.537) -1.25,3.475 64.625,3.475 cw(c64.625,1.45) 66.65,1.45 ; 66.726,-87.675 66.726,1.45